# Altium PCB komparator transporter.PcbDoc
Units mm, origin at the board's own origin, x right, y up, seen from the top; angles counter-clockwise.
Board outline 152.4 x 101.6 mm, 2 copper layers (Top Layer, Bottom Layer); 17 components, 33 nets, 116 pads, 0 vias.
Unrouted connection lines stored in the file: 2.
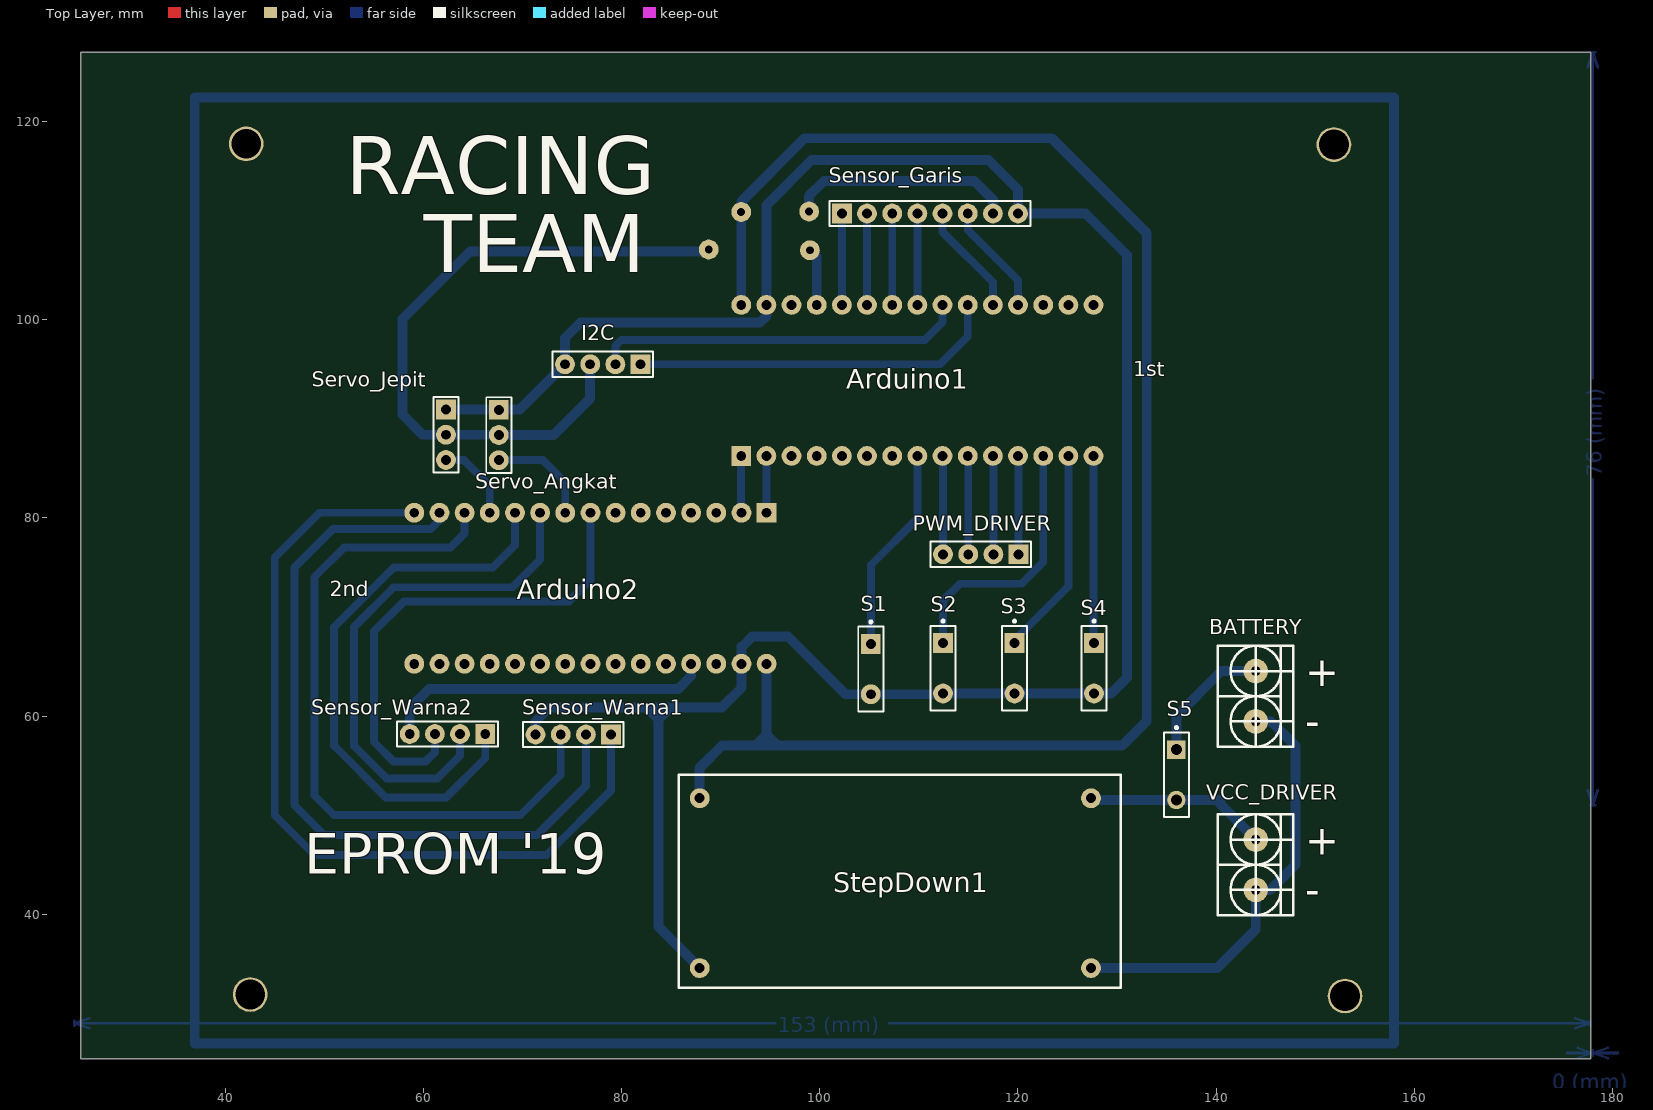
[diagram p0: Top Layer view]
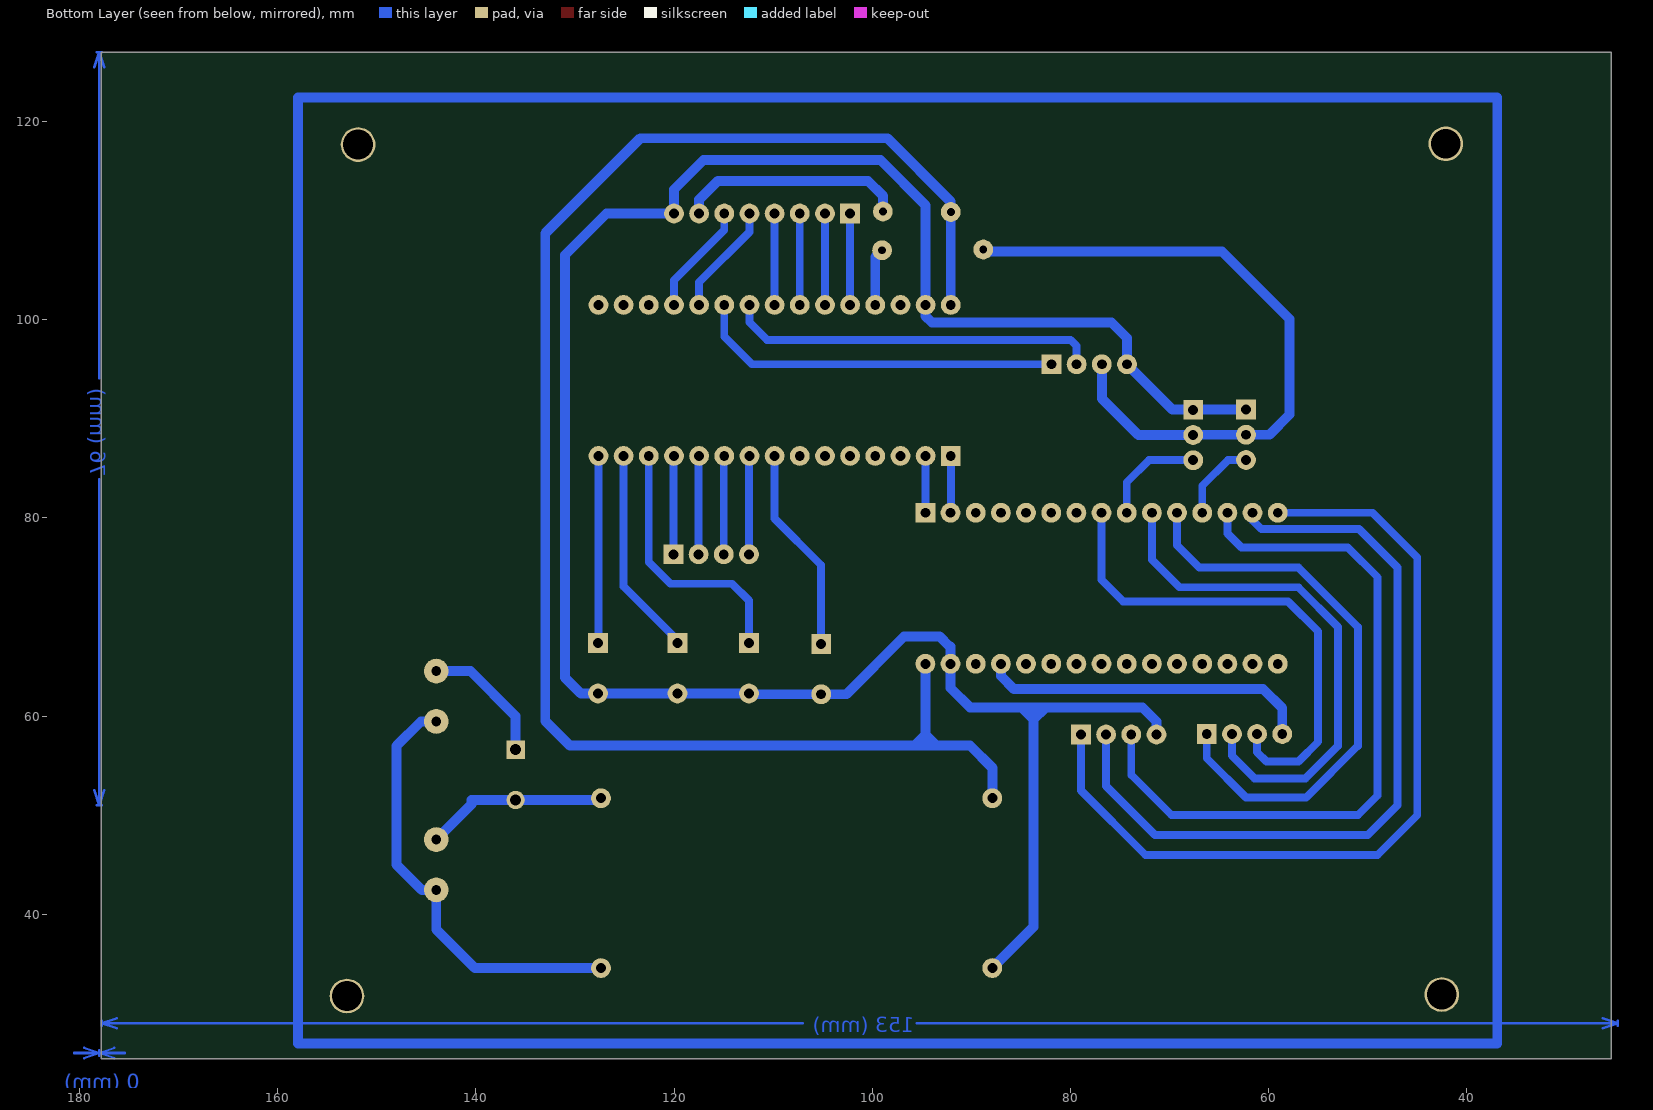
[diagram p1: Bottom Layer view, seen from below]

## Layer stack, top to bottom
Top Solder: solder mask 0.0102, Solder Resist, Dk 3.5
Top Layer: signal copper 0.0356
Dielectric 1: dielectric 0.32, FR-4, Dk 4.8
Bottom Layer: signal copper 0.0356
Bottom Solder: solder mask 0.0102, Solder Resist, Dk 3.5

## Board outline
25.4,25.4 177.8,25.4 177.8,127 25.4,127

## Design rules (kind name [scope] priority, off if disabled: settings)
Clearance [All] p1: gap=0.254
PolygonConnect [All] p1: connectstyle=Relief reliefconductorwidth=0.254 reliefentries=4 polygonreliefangle="90 Angle" airgapwidth=0.254
RoutingVias [All] p1: holewidth=0.711 width=1.27 viastyle="Through Hole" minholewidth=0.711 minwidth=1.27 maxholewidth=0.711 maxwidth=1.27
SolderMaskExpansion [All] p1: expansion=0.102
Width [All] p1: maxlimit=2 minlimit=0.8 preferedwidth=1
30 further rules are at their usual default settings.

## Classes and differential pairs
component class "komparator transporter": 1st 2nd BATTERY I2C PWM_DRIVER S1 S2 S3 S4 Sensor_Garis Sensor_Warna1 Sensor_Warna2 Servo_Angkat Servo_Jepit StepDown1 VCC_DRIVER

## Components (designator, comment, footprint, x,y, rotation, side; value= is the part's Value field where it differs from the comment)
1st "arduinoNano" "Arduino nano" 88.011,84.734 r0 top locked
2nd "arduinoNano" "Arduino nano" 98.704,82.042 r180 top locked
BATTERY "T-BLOK-2" T-BLOK-2 144,62 r270 top
I2C "Header 4" HDR1X4 81.915,95.504 r180 top locked
PWM_DRIVER "Header 4" HDR1X4 120.066,76.327 r180 top locked
S1 "SW-PB" SPST-2#1 105.156,64.745 r270 top locked
S2 "SW-PB" SPST-2#1 112.446,64.821 r270 top locked
S3 "SW-PB" SPST-2#1 119.659,64.821 r270 top locked
S4 "SW-PB" SPST-2#1 127.686,64.821 r270 top locked
S5 "SW-SPST" SPST-2#2 135.992,54.077 r270 top
Sensor_Garis "Header 8" HDR1X8 102.235,110.719 r0 top locked
Sensor_Warna1 "Header 4" HDR1X4 78.943,58.141 r180 top locked
Sensor_Warna2 "Header 4" HDR1X4 66.243,58.191 r180 top locked
Servo_Angkat "Header 3" HDR1X3 67.615,90.907 r270 top locked
Servo_Jepit "Header 3" HDR1X3 62.281,90.932 r270 top locked
StepDown1 "StepDownLM2596" PCBComponent_1 127.381,34.569 r180 top locked
VCC_DRIVER "T-BLOK-2" T-BLOK-2 144,45 r270 top

## Footprints (in the part's own frame and the unit in brackets; to place one, negate y for a bottom-side part, rotate by r counter-clockwise, add the part's x,y. Pads: shape width x height; smd on the part's side, far side on the other; paste and mask are expansions set on the pad)
"Arduino nano" [mm] "arduino nano"
  rect 2x2 hole 1: 0(4.064,1.524)
  round 2 hole 1: 1(6.604,1.524) 2(9.144,1.524) 3(11.684,1.524) 4(14.224,1.524) 5(16.764,1.524) 6(19.304,1.524) 7(21.844,1.524) 8(24.384,1.524) 9(26.924,1.524) 10(29.464,1.524) 11(32.004,1.524) 12(34.544,1.524) 13(37.084,1.524) 14(39.624,1.524) 15(39.624,16.764) 16(37.084,16.764) 17(34.544,16.764) 18(32.004,16.764) 19(29.464,16.764) 20(26.924,16.764) 21(24.384,16.764) 22(21.844,16.764) 23(19.304,16.764) 24(16.764,16.764) 25(14.224,16.764) 26(11.684,16.764) 27(9.144,16.764) 28(6.604,16.764) 29(4.064,16.764)
HDR1X3 [mm] "Connector; Header; 3 Position"
  rect 2x2 hole 1: 1(0,0)
  round 2 hole 1: 2(2.54,0) 3(5.08,0)
  silkscreen extent -1.27,-1.27 6.35,1.27
HDR1X4 [mm] "Connector; Header; 4 Position"
  rect 2x2 hole 1: 1(0,0)
  round 2 hole 1: 2(2.54,0) 3(5.08,0) 4(7.62,0)
  silkscreen extent -1.27,-1.27 8.89,1.27
HDR1X8 [mm] "Connector; Header; 8 Position"
  rect 2x2 hole 1: 1(0,0)
  round 2 hole 1: 2(2.54,0) 3(5.08,0) 4(7.62,0) 5(10.16,0) 6(12.7,0) 7(15.24,0) 8(17.78,0)
  silkscreen extent -1.27,-1.27 19.05,1.27
PCBComponent_1 [mm]
  round 2 hole 1: 1(0,0) 2(39.497,0) 3(0,-17.145) 4(39.497,-17.145)
  silkscreen extent -3,-19.5 41.6,2
SPST-2#1 [mm] "Switch; 2 Leads"
  rect 2x2 hole 1: 1(-2.54,0)
  round 2 hole 1: 2(2.54,0)
  silkscreen extent -4.89,-1.27 4.28,1.27
SPST-2#2 [mm] "Switch; 2 Leads"
  rect 1.85x1.85 hole 1.1: 1(-2.54,0)
  round 1.85 hole 1.1: 2(2.54,0)
  silkscreen extent -4.89,-1.27 4.28,1.27
T-BLOK-2 [mm]
  round 2.5 hole 1: 1(-2.54,0) 2(2.54,0)
  silkscreen extent -5.08,-3.81 5.08,3.81, body extent -3.91,-3.94 3.9,3.56, height 8.5

## Part data
I2C PWM_DRIVER Sensor_Warna1 Sensor_Warna2: "Header, 4-Pin"
S1 S2 S3 S4: "Switch"
S5: "Single-Pole, Single-Throw Switch"
Sensor_Garis: "Header, 8-Pin"
Servo_Angkat Servo_Jepit: "Header, 3-Pin"

## Free pads (board coordinates)
  round 3.5 hole 3: 4(42.113,117.754) 4(42.52,31.902) 4(151.892,117.678) 4(153.01,31.75)
  round 2 hole 0.8: 5(98.933,110.922) 6(92.075,110.871) 7(99.009,107.01) 8(88.798,107.086)

## Nets (pads, with @x,y where several pads share a name; then routed paths per layer and width w, separated by ;. In a path a pad name is that pad's centre, name@x,y a point inside that pad or via, vN(x,y) a via of type N, cw(c..) or ccw(c..) an arc to the next point about the centre after c; other vN are vias at no path point)
0V: BATTERY.2 StepDown1.1 VCC_DRIVER.2 | length 44.3
  Bottom Layer w1: StepDown1.1 140.109,34.569 144,38.46 VCC_DRIVER.2 145.46,42.46 148,45 148,57 145.54,59.46 BATTERY.2
12V: S5.2 StepDown1.3 VCC_DRIVER.1 | length 18.6
  Bottom Layer w1: StepDown1.3 127.559,51.537 S5.2 140.463,51.537 140.463,51.077 VCC_DRIVER.1
+5A: 1st.26 I2C.3 pad.7 pad.8 Servo_Angkat.2 Servo_Jepit.2 | length 73.8
  Bottom Layer w1: I2C.3 76.835,92.05 73.152,88.367 Servo_Angkat.2 67.589,88.392 Servo_Jepit.2 59.919,88.392 57.887,90.424 57.887,100.076 64.694,106.883 pad.8@88.671,106.883 ; pad.7 99.695,106.324 1st.26
+5B: 2nd.26 Sensor_Warna2.4 | length 33.6
  Bottom Layer w1: Sensor_Warna2.4 58.623,60.808 60.554,62.738 85.725,62.738 87.02,64.033 2nd.26
+12V: BATTERY.1 S5.1 | length 13.3
  Bottom Layer w1: S5.1 135.992,59.992 140.54,64.54 BATTERY.1
GND: 1st.28 2nd.28 I2C.4 S1.2 S2.2 S3.2 S4.2 Sensor_Garis.8 Sensor_Warna1.4 Servo_Angkat.1 Servo_Jepit.1 StepDown1.2 | length 236.8
  Bottom Layer w1: Servo_Jepit.1 69.723,90.932 I2C.4 74.295,98.171 75.844,99.72 93.98,99.72 94.615,100.355 1st.28 94.615,111.557 99.162,116.103 117.043,116.103 120.015,113.132 Sensor_Garis.8 126.822,110.719 131,106.541 131,63.868 129.413,62.281 S4.2 S3.2 S2.2 112.37,62.205 S1.2 102.616,62.205 96.799,68.021 93.193,68.021 92.202,67.031 92.1,67.031 ; Sensor_Warna1.4 71.323,59.461 72.72,60.858 82.601,60.858 ; StepDown1.2 83.718,38.735 83.718,59.639 ; 92.1,66.98 2nd.28 92.1,62.84 90.119,60.858 84.938,60.858 ; 82.601,60.858 82.55,60.808 83.718,59.639 ; 82.601,60.858 83.718,60.858 ; 83.718,59.639 84.938,60.858 ; 83.718,59.639 83.718,60.858 ; 83.718,60.858 84.938,60.858
Net1st_0: 1st.0 2nd.1 | length 5.7
  Bottom Layer w0.8: 2nd.1@92.075,80.543 1st.0
Net1st_1: 1st.1 2nd.0 | length 5.7
  Bottom Layer w0.8: 2nd.0 1st.1@94.64,86.233
Net1st_7: 1st.7 S1.1 | length 20.9
  Bottom Layer w0.8: S1.1 105.156,75.235 109.855,79.934 1st.7
Net1st_8: 1st.8 PWM_DRIVER.4 | length 9.9
  Bottom Layer w0.8: PWM_DRIVER.4 1st.8@112.446,86.208
Net1st_9: 1st.9 PWM_DRIVER.3 | length 9.9
  Bottom Layer w0.8: PWM_DRIVER.3 1st.9@114.986,86.208
Net1st_10: 1st.10 PWM_DRIVER.2 | length 9.9
  Bottom Layer w0.8: PWM_DRIVER.2 1st.10@117.526,86.208
Net1st_11: 1st.11 PWM_DRIVER.1 | length 9.9
  Bottom Layer w0.8: PWM_DRIVER.1 1st.11@120.066,86.208
Net1st_12: 1st.12 S2.1 | length 26.7
  Bottom Layer w0.8: S2.1 112.446,71.653 114.148,73.355 120.355,73.355 122.555,75.555 1st.12
Net1st_13: 1st.13 S3.1 | length 21.1
  Bottom Layer w0.8: S3.1 119.659,67.659 125.095,73.095 1st.13
Net1st_14: 1st.14 S4.1 | length 18.9
  Bottom Layer w0.8: 1st.14 127.635,67.412 S4.1
Net1st_18: 1st.18 Sensor_Garis.6 | length 11.3
  Bottom Layer w0.8: Sensor_Garis.6 114.935,109.068 120.015,103.988 1st.18
Net1st_19: 1st.19 Sensor_Garis.5 | length 11.3
  Bottom Layer w0.8: Sensor_Garis.5 112.395,108.864 117.475,103.784 1st.19
Net1st_20: 1st.20 I2C.1 | length 37.4
  Bottom Layer w0.8: I2C.1 112.141,95.504 114.935,98.298 1st.20
Net1st_21: 1st.21 I2C.2 | length 37.6
  Bottom Layer w0.8: I2C.2 79.375,97.358 79.985,97.968 110.617,97.968 112.395,99.746 1st.21
Net1st_22: 1st.22 Sensor_Garis.4 | length 9.2
  Bottom Layer w0.8: 1st.22 Sensor_Garis.4
Net1st_23: 1st.23 Sensor_Garis.3 | length 9.2
  Bottom Layer w0.8: 1st.23 Sensor_Garis.3
Net1st_24: 1st.24 Sensor_Garis.2 | length 9.2
  Bottom Layer w0.8: 1st.24 Sensor_Garis.2
Net1st_25: 1st.25 Sensor_Garis.1 | length 9.2
  Bottom Layer w0.8: 1st.25 Sensor_Garis.1
Net2nd_7: 2nd.7 Sensor_Warna2.3 | length 51.5
  Bottom Layer w0.8: Sensor_Warna2.3 61.163,56.363 60.223,55.423 56.998,55.423 55,57.42 55,68.538 58.039,71.577 74.676,71.577 76.86,73.762 2nd.7 2nd.7@77.14,80.797
Net2nd_8: 2nd.8 Servo_Angkat.3 | length 10.8
  Bottom Layer w0.8: Servo_Angkat.3 72.085,85.827 74.32,83.591 2nd.8 2nd.8@74.422,80.62
Net2nd_9: 2nd.9 Sensor_Warna2.2 | length 53.5
  Bottom Layer w0.8: Sensor_Warna2.2 63.703,56.007 61.417,53.721 56.279,53.721 53,57 53,69 57,73 69,73 71.78,75.78 2nd.9
Net2nd_10: 2nd.10 Sensor_Warna2.1 | length 58.4
  Bottom Layer w0.8: Sensor_Warna2.1 66.243,55.753 62.281,51.791 56.209,51.791 51,57 51,69 57,75 67,75 69.24,77.24 2nd.10
Net2nd_11: 2nd.11 Servo_Jepit.3 | length 8.2
  Bottom Layer w0.8: Servo_Jepit.3 64.084,85.852 66.7,83.236 2nd.11
Net2nd_12: 2nd.12 Sensor_Warna1.3 | length 72.5
  Bottom Layer w0.8: 2nd.12 64.16,78.435 62.738,77.013 52.013,77.013 49,74 49,52 51,50 69.787,50 73.863,54.077 Sensor_Warna1.3
Net2nd_13: 2nd.13 Sensor_Warna1.2 | length 79.3
  Bottom Layer w0.8: 2nd.13 61.62,79.756 60.728,78.864 58.395,78.864 58.367,78.892 50.892,78.892 47,75 47,51 50,48 71.47,48 76.403,52.934 Sensor_Warna1.2
Net2nd_14: 2nd.14 Sensor_Warna1.1 | length 85.9
  Bottom Layer w0.8: 2nd.14 49.518,80.518 45,76 45,50 49,46 72.441,46 78.943,52.502 Sensor_Warna1.1
VCC: 1st.29 2nd.29 pad.5 pad.6 Sensor_Garis.7 StepDown1.4 | length 191.7
  Bottom Layer w1: StepDown1.4 87.884,54.788 90.145,57.048 93.548,57.048 ; 1st.29 92.075,111.912 98.476,118.313 123.419,118.313 133,108.732 133,59.518 130.531,57.048 95.733,57.048 ; 2nd.29 94.64,58.141 ; pad.5@98.933,110.795 98.933,112.514 100.414,113.995 115.595,113.995 117.475,112.116 Sensor_Garis.7 ; 93.548,57.048 94.64,58.141 ; 93.548,57.048 94.64,57.048 ; 94.64,57.048 94.64,58.141 ; 94.64,57.048 95.733,57.048 ; 94.64,58.141 95.733,57.048
pads on no net: 1st.2 1st.3 1st.4 1st.5 1st.6 1st.15 1st.16 1st.17 1st.27 2nd.2 2nd.3 2nd.4 2nd.5 2nd.6 2nd.15 2nd.16 2nd.17 2nd.18 2nd.19 2nd.20 2nd.21 2nd.22 2nd.23 2nd.24 2nd.25 2nd.27
copper on no net: | length 667.7
  Bottom Layer w0.254: 24.761,28.746 24.761,29.254 ; 26.285,28.492 24.761,29 ; 26.285,29.508 24.761,29 ; 95.523,29 24.761,29 ; 107,29 177.761,29 ; 175.46,26 178,26 ; 176.237,28.492 177.761,29 ; 176.237,29.508 177.761,29 ; 176.476,25.492 178,26 ; 176.476,26.508 178,26 ; 177.492,52.524 178,51 ; 177.492,125.476 178,127 ; 177.746,51 178.254,51 ; 177.746,127 178.254,127 ; 177.761,28.746 177.761,29.254 ; 178,83.896 178,51 ; 178,94.104 178,127 ; 178.508,52.524 178,51 ; 178.508,125.476 178,127 ; 179.524,25.492 178,26 ; 179.524,26.508 178,26 ; 180.54,26 178,26 ; 178,25.746 178,26.254 178,25.746
  Bottom Layer w1: 36.932,26.975 36.932,122.403 36.957,122.428 157.963,122.428 157.963,26.975 36.932,26.975

## Other copper
Bottom Layer:
  text "76 (mm)" at 178.914,84.15 h1.52 r90
  text "153 (mm)" at 95.777,28.086 h1.52
  text "0 (mm)" at 173.912,22.343 h1.52

## Silkscreen, mask and mechanical layers (free items; w line width, h text height)
Top Overlay:
  text "RACING" at 52.146,110.744 h10
  text "TEAM" at 60.02,102.895 h10
  text "Arduino1" at 102.667,93.04 h2
  text "Arduino2" at 69.444,71.806 h2
  text "+" at 149,63 h3
  text "-" at 149,58 h3
  text "+" at 149,46 h3
  text "EPROM '19" at 47.955,42.723 h7
  text "-" at 149,41 h3